# EAGLE board rgb_stripe_control (EAGLE 9.6.2)
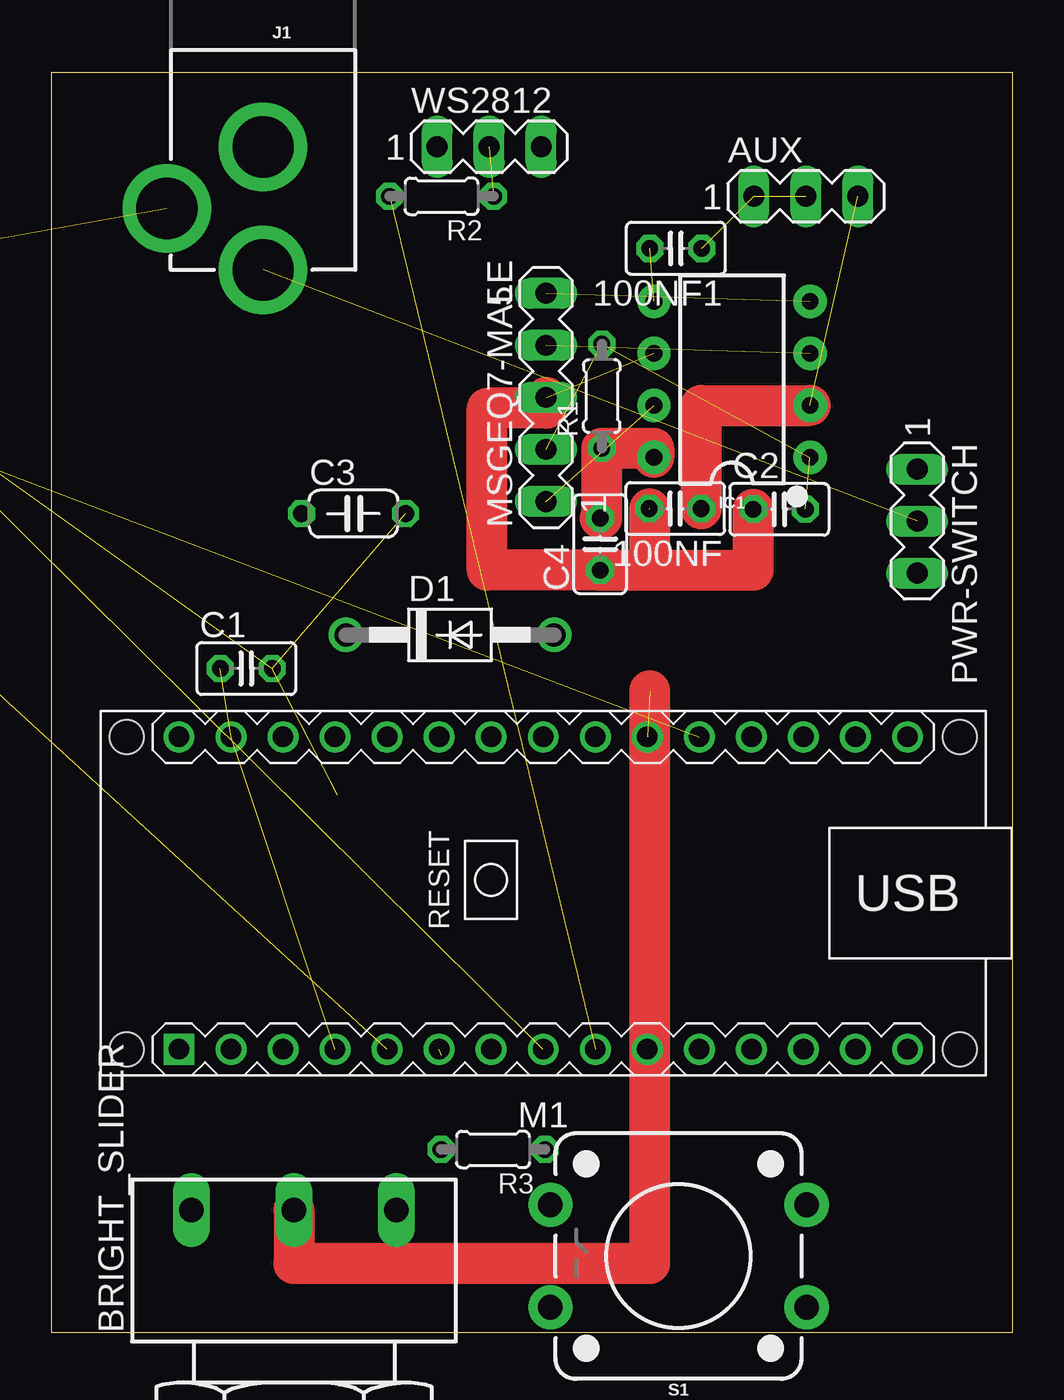
[diagram p0: board, top side]
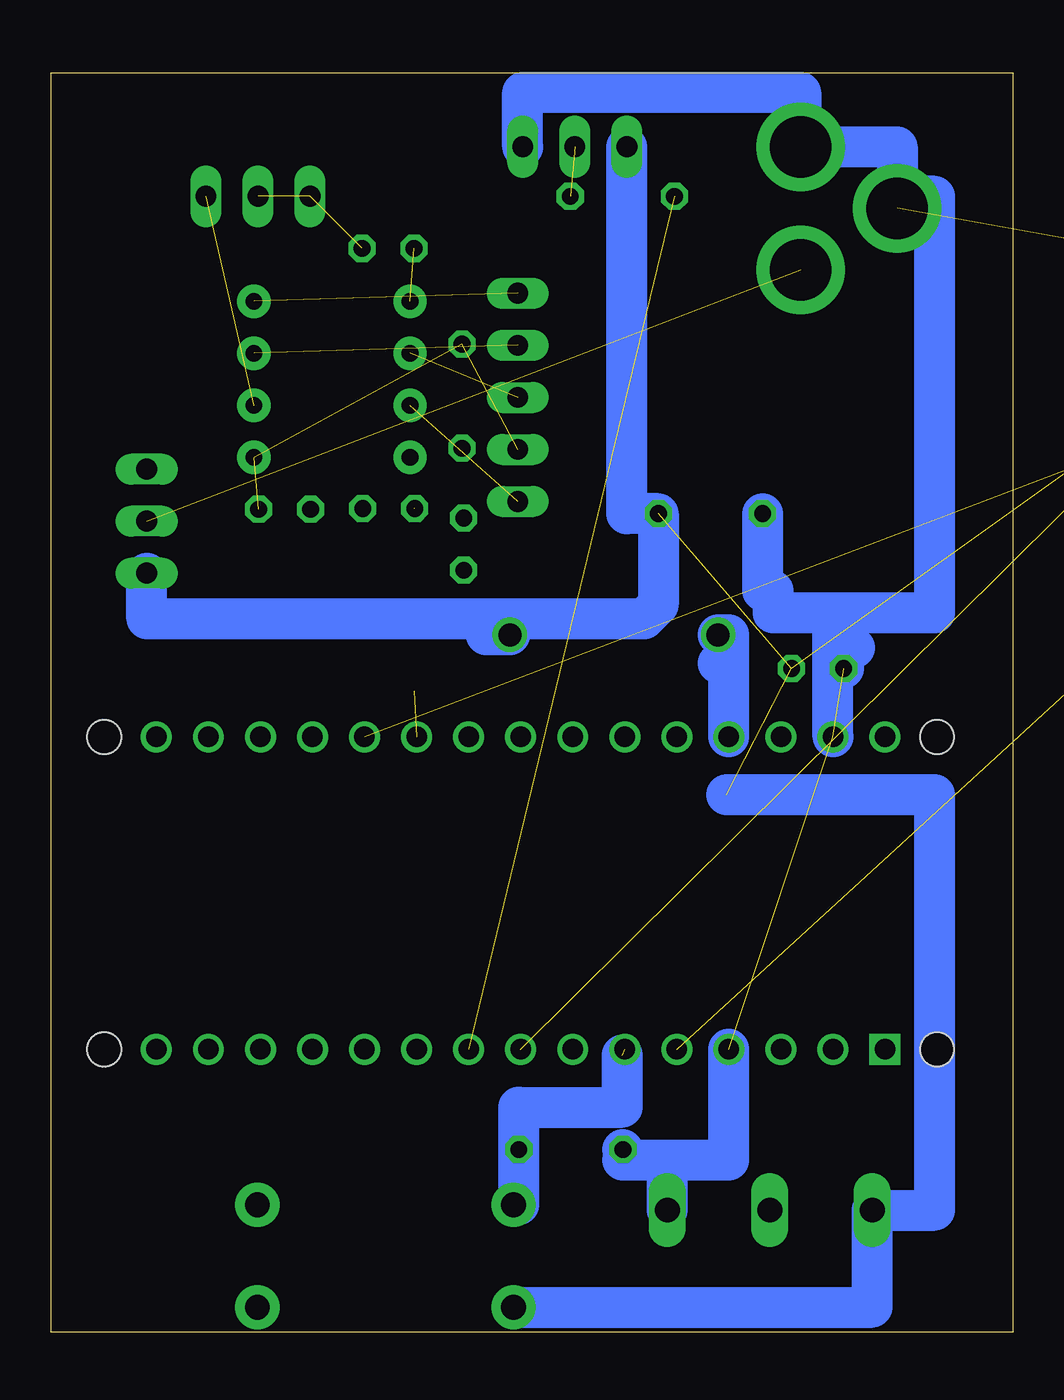
[diagram p1: board, bottom side, seen from below]

Size 46.92 x 61.45 mm. Coordinates in mm from the lower left corner, seen from the top.
Outline: 0,0 46.92,0 46.92,61.45 0,61.45 0,0
Copper layers (1*16): Top 0.035mm / dielectric 1.5mm / Bottom 0.035mm
Design rules "default": minimum track width 6mil, minimum drill 0.35mm, track to track 6mil, track to pad 6mil, pad to pad 6mil, via to via 6mil, smd to smd 6mil, copper to edge 40mil, drill to drill 6mil, minimum pad ring 10mil, minimum via ring 8mil, stop-mask expansion 4mil, vias tented up to drill 0mil, thermal gap 10mil

## Footprints (pad centres in the part's own frame; a part is rotated, then mirrored left to right if it is on the bottom)
C025-025X050 = drill 0.813 octagon: 1 -1.27,0; 2 1.27,0
MA03-1 = drill 1.016 long: 1 -2.54,0; 2 0,0; 3 2.54,0
PC16S = drill 1.2 long: 1A -5,6.5; 1E 5,6.5; 1S 0,6.5
C050-024X044 = drill 0.813 octagon: 1 -2.54,0; 2 2.54,0
DO41-10 = drill 1.118: A 5.08,0; C -5.08,0
DIP08 = drill 0.813 pad 1.626: 1 -3.81,-3.81; 2 -1.27,-3.81; 3 1.27,-3.81; 4 3.81,-3.81; 5 3.81,3.81; 6 1.27,3.81; 7 -1.27,3.81; 8 -3.81,3.81
POWER_JACK_PTH = drill 2.997 pad 4.318: GND 0,7.7; GNDBREAK 4.7,10.7; PWR 0,13.7
ARDUINO-NANO-3.0 = drill 1 square: J1.1 17.78,7.62 | drill 1: J1.2 15.24,7.62; J1.3 12.7,7.62; J1.4 10.16,7.62; J1.5 7.62,7.62; J1.6 5.08,7.62; J1.7 2.54,7.62; J1.8 0,7.62; J1.9 -2.54,7.62; J1.10 -5.08,7.62; J1.11 -7.62,7.62; J1.12 -10.16,7.62; J1.13 -12.7,7.62; J1.14 -15.24,7.62; J1.15 -17.78,7.62; J2.1 17.78,-7.62; J2.2 15.24,-7.62; J2.3 12.7,-7.62; J2.4 10.16,-7.62; J2.5 7.62,-7.62; J2.6 5.08,-7.62; J2.7 2.54,-7.62; J2.8 0,-7.62; J2.9 -2.54,-7.62; J2.10 -5.08,-7.62; J2.11 -7.62,-7.62; J2.12 -10.16,-7.62; J2.13 -12.7,-7.62; J2.14 -15.24,-7.62; J2.15 -17.78,-7.62 | hole 1.651: -20.32,7.62; -20.32,-7.62; 20.32,-7.62; 20.32,7.62
MA05-1 = drill 1.016 long: 1 -5.08,0; 2 -2.54,0; 3 0,0; 4 2.54,0; 5 5.08,0
0204/5 = drill 0.813 octagon: 1 -2.54,0; 2 2.54,0
TACTILE_SWITCH_PTH_12MM = drill 1.2 pad 2.159: 1 6.25,-2.5; 2 -6.25,-2.5; 3 6.25,2.5; 4 -6.25,2.5

## Placement (x,y rotation side)
100NF  33pF  [C025-025X050]  30.45,40.19 180 top
100NF1  10nF  [C025-025X050]  30.48,52.89 180 top
AUX  [MA03-1]  36.83,55.43 0 top
BRIGHT_SLIDER  PC16S  [PC16S]  11.85,-0.54 0 top
C1  10nF  [C025-025X050]  9.52,32.39 0 top
C2  100nF  [C025-025X050]  35.53,40.16 0 top
C3  1000uF  [C050-024X044]  14.75,39.95 0 top
C4  33pF  [C025-025X050]  26.79,38.46 90 top
D1  1N4004  [DO41-10]  19.46,34.03 0 top
IC1  MSGEQ7P  [DIP08]  33.22,46.5 90 top
J1  POWER_JACK  [POWER_JACK_PTH]  10.34,65.55 180 top
M1  ARDUINO-NANO-3.0  [ARDUINO-NANO-3.0]  24.01,21.43 180 top
MSGEQ7-FEMALE  [MA05-1]  -18.21,50.55 90 top  (outside the outline)
MSGEQ7-MALE  [MA05-1]  24.15,45.62 90 top
PWR-SWITCH  [MA03-1]  42.26,39.58 270 top
R1  200k  [0204/5]  26.87,45.68 90 top
R2  220  [0204/5]  19.05,55.43 180 top
R3  10k  [0204/5]  21.56,8.92 180 top
S1  MODE_SWITCH  [TACTILE_SWITCH_PTH_12MM]  30.61,3.72 180 top
WS2812  [MA03-1]  21.37,57.85 0 top

## Library data of the parts
100NF 100NF1 C1-C4 R1-R3 = resistor
AUX MSGEQ7-FEMALE MSGEQ7-MALE PWR-SWITCH WS2812 = con-lstb; OC_FARNELL: unknown; OC_NEWARK: unknown
BRIGHT_SLIDER = piher; OC_FARNELL: 4452940; OC_NEWARK: unknown
D1 = diode
IC1 = SparkFun-IC-Special-Function; PROD_ID: IC-12196
J1 = SparkFun-Connectors; PROD_ID: CONN-08197
M1 = diy-modules
S1 = SparkFun-Switches; PROD_ID: SWCH-09185; SF_SKU: COM-09190

## Nets
3V3: M1.J2.14
GND: BRIGHT_SLIDER.1E C1.1 C3.1 J1.GND J1.GNDBREAK M1.J1.4 M1.J2.2 MSGEQ7-FEMALE.3 R3.2 WS2812.3
N$1: D1.C M1.J2.4
N$2: M1.J1.8 MSGEQ7-FEMALE.5
N$3: M1.J2.11 MSGEQ7-FEMALE.2
N$4: M1.J1.5 MSGEQ7-FEMALE.1
N$5: C2.2 IC1.1 MSGEQ7-MALE.2 R1.2
N$6: 100NF.2 C2.1 C4.1 IC1.6 MSGEQ7-MALE.3
N$7: IC1.3 MSGEQ7-MALE.4
N$8: IC1.4 MSGEQ7-MALE.5
N$9: IC1.7 MSGEQ7-MALE.1
N$10: 100NF1.1 AUX.1 AUX.2
N$11: C4.2 IC1.8 R1.1
N$12: 100NF.1 AUX.3 IC1.2
N$13: 100NF1.2 IC1.5
N$14: M1.J1.9 R2.2
N$15: BRIGHT_SLIDER.1S M1.J2.10
N$16: R2.1 WS2812.2
N$17: M1.J1.6 R3.1 S1.1
N$19: J1.PWR PWR-SWITCH.2
VCC: BRIGHT_SLIDER.1A C1.2 C3.2 D1.A MSGEQ7-FEMALE.4 PWR-SWITCH.3 S1.3 WS2812.1
VIN: M1.J2.1

## Tracks (layer width: path | path; a pad name or v marks a point on that pad's centre or on a via)
GND  (3 unrouted)
  Bottom 2: M1.J2.2 8.77,35.11 | 8.77,35.11 3.81,35.11 3.81,55.43 5.64,55.43 J1.GNDBREAK 5.64,57.85 J1.GND 10.34,60.51 23.91,60.51 WS2812.3 | C3.1 12.21,36.18 11.7,36.18 11.7,35.11 8.77,35.11 | C1.1 8.25,33.41 7.71,33.41 | BRIGHT_SLIDER.1E 16.85,8.41 | M1.J1.4 13.85,8.41 16.85,8.41 | R3.2 19.02,8.41 16.85,8.41
N$1
  Bottom 2: M1.J2.4 13.85,32.66 | 13.85,32.66 14.36,32.66 | 13.85,32.66 13.85,34.03 D1.C
N$2  (1 unrouted)
N$3  (1 unrouted)
N$4  (1 unrouted)
N$5  (3 unrouted)
N$6  (2 unrouted)
  Top 2: 29.21,37.19 C4.1 21.27,37.19 21.27,45.1 24.15,45.1 MSGEQ7-MALE.3 | 29.21,37.19 29.21,40.19 | 29.21,37.19 34.26,37.19 C2.1
N$7  (1 unrouted)
N$8  (1 unrouted)
N$9  (1 unrouted)
N$10  (2 unrouted)
N$11
  Top 2: C4.2 26.87,39.73 R1.1 29.41,43.14 IC1.8
N$12  (1 unrouted)
  Top 2: 100NF.1 31.72,45.23 IC1.2
N$13  (1 unrouted)
N$14  (1 unrouted)
N$15  (1 unrouted)
  Top 2: BRIGHT_SLIDER.1S 11.85,3.36 29.21,3.36 29.21,31.3
N$16  (1 unrouted)
N$17  (1 unrouted)
  Bottom 2: S1.1 24.1,6.22 R3.1 24.1,10.98 19.05,10.98 19.05,13.52
N$19  (1 unrouted)
VCC  (3 unrouted)
  Bottom 2: 25.7,34.81 17.99,34.81 17.29,35.51 C3.2 18.83,39.95 WS2812.1 | 25.7,34.81 42.26,34.81 PWR-SWITCH.3 | D1.A 25.7,34.03 25.7,34.81 | 13.97,26.22 3.81,26.22 3.81,5.96 BRIGHT_SLIDER.1A 6.85,1.22 S1.3